# Altium PCB isa_svga.PcbDoc (part 2 of 2)
Units mm, origin at the board's own origin, x right, y up, seen from the top; angles counter-clockwise.
Board outline 104.14 x 87.63 mm, 2 copper layers (Front, Back); 62 components, 153 nets, 436 pads, 95 vias.
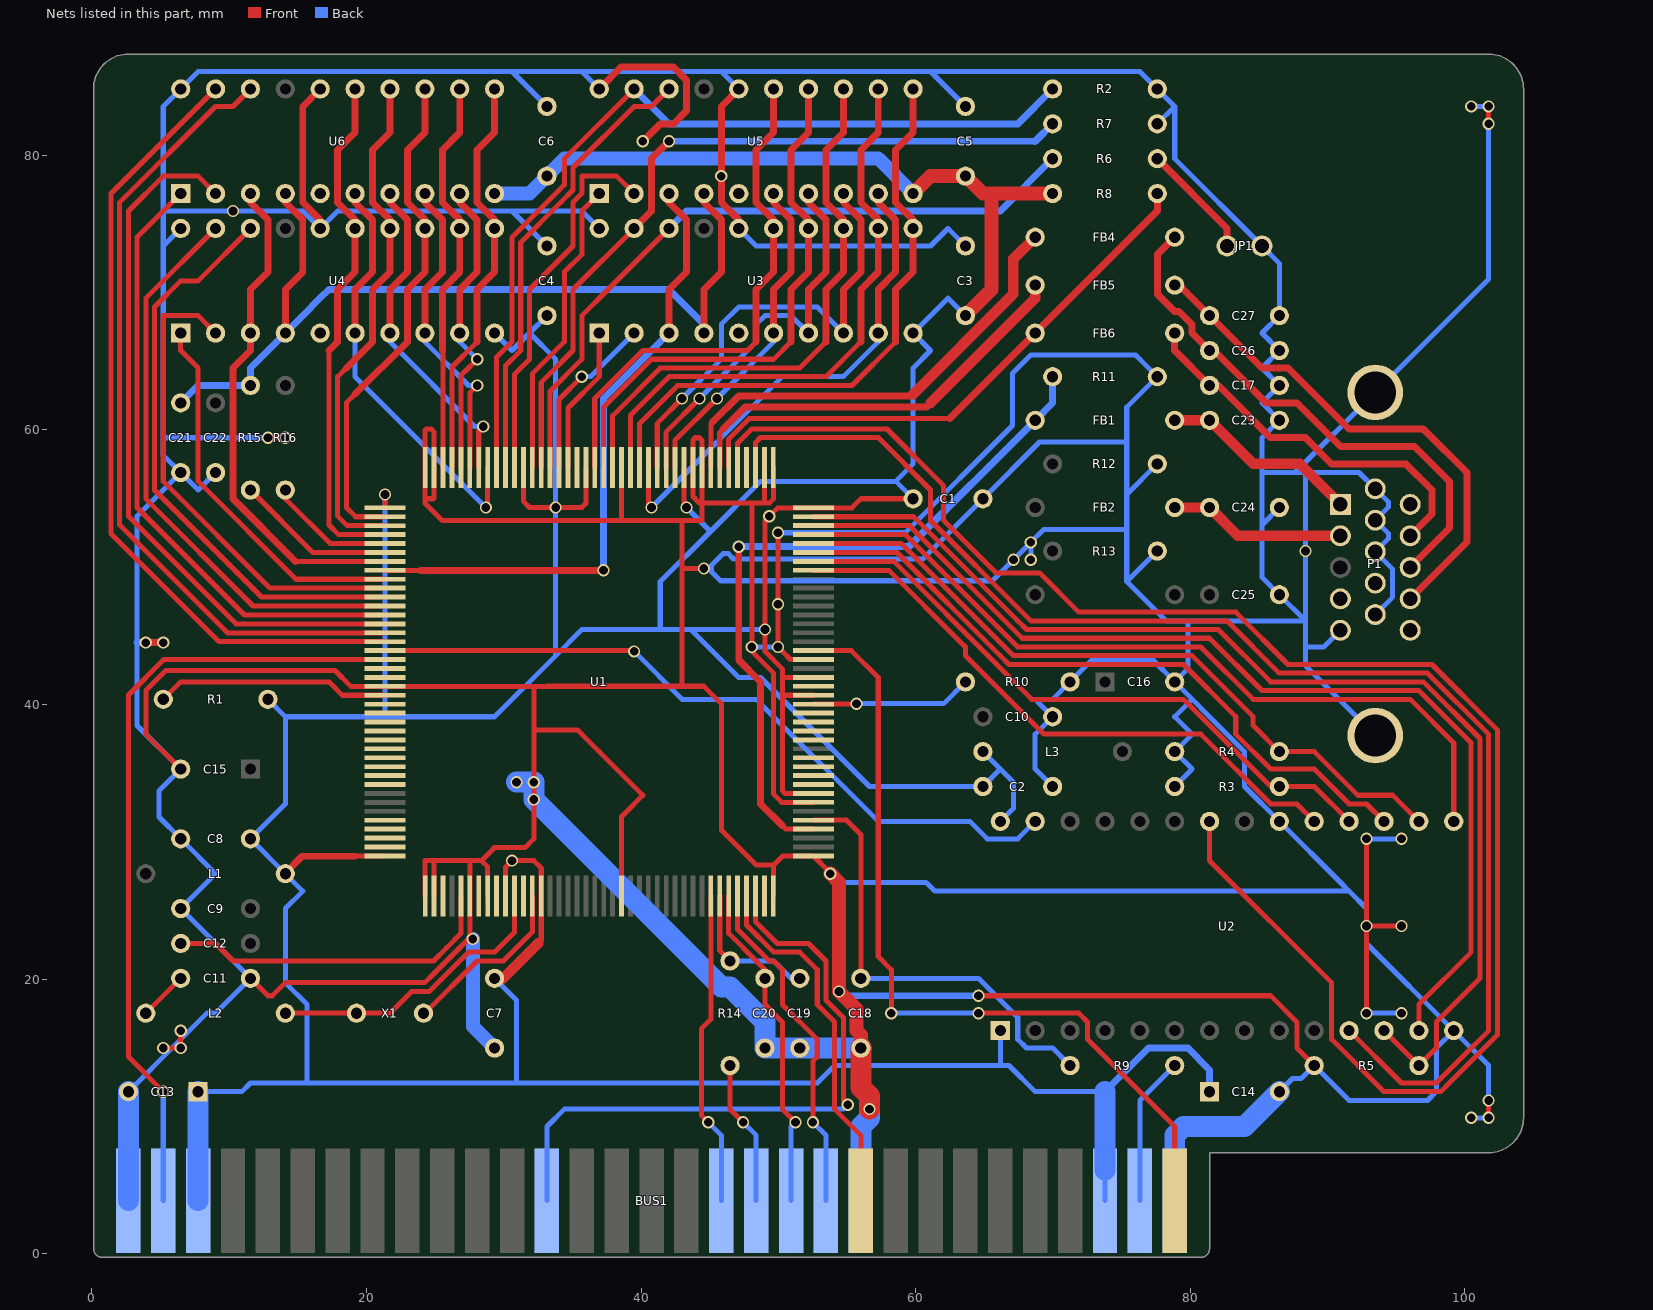
[diagram p2: the nets of this part, all layers, seen from the top]

## Via types
v1: diameter 0.889, hole 0.635, Front to Back, tented both sides, 95 vias

## Nets (pads, with @x,y where several pads share a name; then routed paths per layer and width w, separated by ;. In a path a pad name is that pad's centre, name@x,y a point inside that pad or via, vN(x,y) a via of type N, cw(c..) or ccw(c..) an arc to the next point about the centre after c; other vN are vias at no path point) (continued)
GND: BUS1.1 BUS1.10 BUS1.31 C1.2 C2.2 C3.2 C4.2 C5.2 C6.2 C7.2 C8.2 C9.2 C10.2 C11.2 C13.2 C14.2 C15.2 C16.2 C17.2 C18.2 C19.2 C20.2 C21.2 C22.2 C23.2 C24.2 C25.2 C26.2 C27.2 JP1.2 P1.5 P1.6 P1.7 P1.8 P1.10 P1.Un1 P1.Un2 R2.2 R3.2 R4.2 R5.2 R7.2 R10.2 R11.2 R12.2 R13.2 U1.1 U1.7 U1.23 U1.41 U1.42 U1.49 U1.50 U1.58 U1.79 U1.80 U1.101 U1.121 U1.122 U1.126 U1.128 U1.143 U1.160 U2.14 U2.20 U3.16 U3.20 U4.16 U4.20 U5.16 U5.20 U6.16 U6.20 | length 1092.6
  Front w0.368: v1(5.207,14.986) v1(6.477,14.986) v1(6.477,16.256) ; C15.2@6.477,35.306 3.937,37.846 3.937,41.021 5.397,42.481 17.716,42.481 18.867,41.331 U1.101@21.356,41.331 23.939,41.331 32.194,41.331 ; C11.2@11.557,20.066 12.827,18.796 13.144,18.796 14.097,19.748 24.257,19.748 24.892,20.383 27.432,22.924 v1(27.749,22.924) 27.531,23.142 U1.126@27.531,26.055 27.531,28.639 27.432,28.639 ; v1(12.827,59.436) v1(14.097,59.436) ; U1.121@24.282,26.055 24.282,28.639 24.257,28.639 24.575,28.639 24.892,28.639 ; 24.282,55.283 24.282,55.308 ; U1.122@24.933,26.055 24.933,28.639 24.892,28.639 ; U1.128@28.832,26.055 28.832,28.191 28.384,28.639 ; U1.143@38.583,26.055 38.583,30.861 38.583,31.496 38.583,31.852 38.862,32.131 40.132,33.401 36.957,36.576 35.687,37.846 35.369,38.163 32.194,38.163 ; U1.58@38.583,57.257 38.583,53.404 38.544,53.404 ; v1(44.577,49.911) 42.989,49.911 ; U1.42@48.981,57.257 48.981,54.673 49.022,54.673 ; U1.160@49.632,26.055 49.632,28.321 ; U1.41@49.632,57.257 49.632,54.966 49.34,54.673 49.022,54.673 ; v1(49.974,52.514) v1(49.974,47.307) v1(49.974,44.196) 50.292,43.878 50.889,43.282 U1.23@52.558,43.282 ; U1.7@52.558,32.883 50.249,32.883 49.657,33.475 49.657,42.291 48.387,43.561 48.069,43.878 v1(48.069,44.196) 48.069,53.404 48.069,54.673 ; v1(53.785,27.686) 53.785,27.755 U1.1@52.558,28.981 50.317,28.981 49.657,28.321 49.632,28.321 ; v1(64.579,18.796) 85.852,18.796 87.757,16.891 87.757,14.986 R5.2@89.027,13.716 ; v1(92.837,17.526) 92.837,22.606 v1(92.837,30.226) ; v1(92.837,23.876) v1(95.377,23.876) ; v1(101.727,9.906) v1(101.727,11.176) ; v1(101.727,82.296) v1(101.727,83.566) ; 24.282,54.991 24.282,54.648 25.527,53.404 37.592,53.404 38.544,53.404 ; 24.282,54.991 24.282,55.308 ; 24.282,54.991 24.892,54.991 24.933,55.032 24.933,55.349 U1.79@24.933,57.257 24.933,59.84 24.701,60.071 24.371,60.071 24.282,59.982 U1.80@24.282,57.257 24.282,55.308 ; 24.892,28.639 27.432,28.639 ; 27.432,28.639 28.384,28.639 ; 28.384,28.639 29.019,29.273 29.337,29.591 31.559,29.591 32.194,30.226 32.194,33.401 32.194,34.671 32.194,38.163 ; 32.194,38.163 32.194,39.751 32.194,41.331 ; 32.194,41.331 33.139,41.331 33.147,41.338 42.989,41.338 ; 38.544,53.404 42.989,53.404 ; 42.989,41.338 44.577,41.338 45.847,40.069 45.847,30.861 48.387,28.321 49.632,28.321 ; 42.989,41.338 42.989,49.911 ; 42.989,49.911 42.989,51.181 42.989,53.404 ; 42.989,53.404 44.259,53.404 44.432,53.404 44.432,54.991 ; 44.432,54.991 U1.49@44.432,57.257 44.432,59.263 44.259,59.436 43.942,59.436 43.782,59.276 U1.50@43.782,57.257 43.782,55.151 44.259,54.673 44.577,54.673 ; 44.432,54.991 44.432,54.673 44.577,54.673 ; 44.577,54.673 45.212,54.673 48.069,54.673 ; 48.069,54.673 48.387,54.673 49.022,54.673
  Front w0.505: v1(3.937,44.514) v1(5.207,44.514) ; U4.16@16.637,74.676 16.637,75.311 15.367,76.581 15.367,83.566 U6.16@16.637,84.836 ; U5.20@36.957,84.836 38.544,86.423 42.355,86.423 43.307,85.471 43.307,83.248 42.355,82.296 41.402,82.296 v1(40.132,81.026) ; U3.16@47.117,74.676 47.117,75.311 45.847,76.581 v1(45.847,78.486) 45.847,83.566 U5.16@47.117,84.836
  Front w0.762: 55.689,16.256 56.007,15.938
  Front w1.016: v1(53.785,27.686) 54.419,27.051 v1(54.419,19.113) 55.689,17.843 55.689,16.256 ; C18.2@56.007,14.986 56.007,15.938
  Front w1.524: C18.2@56.007,14.986 56.007,12.128 56.642,11.493 56.642,11.176 v1(56.642,10.541)
  Back w0.368: C13.2@2.667,11.811 6.159,15.303 ; v1(6.477,14.986) 6.159,15.303 ; U4.20@6.477,74.676 5.207,73.406 5.207,73.088 ; C22.2@9.017,56.896 7.747,55.626 C21.2@6.477,56.896 ; v1(12.827,59.436) 5.207,59.436 ; C4.2@33.147,73.406 30.607,75.946 ; C6.2@33.147,83.566 30.607,86.106 ; U3.20@36.957,74.676 35.687,75.946 30.607,75.946 ; U5.20@36.957,84.836 35.687,86.106 ; v1(44.577,49.911) 45.148,49.911 v1@44.895,49.911 ; U3.16@47.117,74.676 48.387,73.406 60.452,73.406 60.77,73.406 61.087,73.406 62.357,74.676 62.517,74.516 C3.2@63.627,73.406 ; U5.16@47.117,84.836 45.847,86.106 ; v1(48.069,44.196) v1(49.974,44.196) ; v1(49.974,52.514) 59.245,52.514 67.056,60.325 67.056,64.135 68.389,65.468 76.01,65.468 76.327,65.151 R11.2@77.597,63.881 75.374,61.658 75.374,59.118 ; v1(53.785,27.686) 54.419,27.051 54.742,27.051 ; 54.737,27.056 54.742,27.051 ; C5.2@63.627,83.566 61.087,86.106 ; v1(68.389,50.546) v1(68.389,51.816) ; C2.2@69.977,34.036 68.707,35.306 68.707,37.846 C10.2@69.977,39.116 69.025,40.069 68.707,40.386 69.977,40.386 R10.2@71.247,41.656 72.834,43.243 77.279,43.243 C16.2@78.867,41.656 ; R13.2@77.597,51.181 75.374,48.959 ; R12.2@77.597,57.531 75.374,55.308 ; R7.2@77.597,82.296 78.867,83.566 ; R3.2@78.867,34.036 80.137,35.306 R4.2@78.867,36.576 80.137,37.846 78.867,39.116 80.137,40.386 ; C14.2@86.487,11.811 87.439,12.763 88.075,12.763 R5.2@89.027,13.716 91.567,11.176 97.282,11.176 97.917,11.811 97.917,14.986 U2.14@99.187,16.256 ; C24.2@86.487,54.356 85.217,53.086 ; P1.5@90.932,45.41 89.718,44.196 88.392,44.196 ; v1(92.837,17.526) v1(95.377,17.526) ; P1.Un1@93.472,37.747 88.392,42.827 88.392,44.196 ; P1.10@93.472,46.556 94.742,47.826 94.742,49.865 P1.8@93.472,51.135 94.424,52.088 94.424,52.474 P1.7@93.472,53.426 94.424,54.379 94.424,54.765 P1.6@93.472,55.717 92.293,56.896 88.392,56.896 ; P1.Un2@94.292,61.465 P1.Un2@94.292,62.161 ; v1(95.377,30.226) v1(92.837,30.226) 92.837,25.146 ; v1(100.457,9.906) v1(101.727,9.906) ; v1(100.457,83.566) v1(101.727,83.566) ; v1(101.727,11.176) 101.727,13.716 U2.14@99.187,16.256 ; v1(101.727,82.296) 101.727,70.99 P1.Un2@93.472,62.735 87.633,56.896 ; 5.207,59.436 5.207,73.088 ; 5.207,59.436 5.207,58.166 C21.2@6.477,56.896 ; 5.207,73.088 5.207,75.946 ; 5.207,75.946 v1(10.287,75.946) 15.367,75.946 U4.16@16.637,74.676 17.907,75.946 30.607,75.946 ; 5.207,75.946 5.207,83.566 U6.20@6.477,84.836 7.747,86.106 30.607,86.106 ; 6.159,15.303 8.382,17.526 9.017,17.526 C11.2@11.557,20.066 C9.2@6.477,25.146 8.7,27.368 9.017,27.686 C8.2@6.477,30.226 4.889,31.813 4.889,33.718 C15.2@6.477,35.306 3.302,38.481 3.302,44.514 3.302,45.466 3.302,53.721 C21.2@6.477,56.896 ; 30.607,86.106 35.687,86.106 ; 35.687,86.106 45.847,86.106 ; 45.847,86.106 60.77,86.106 61.087,86.106 ; 54.742,27.051 59.182,27.051 60.77,27.051 61.404,26.416 91.567,26.416 ; 61.087,86.106 76.327,86.106 R2.2@77.597,84.836 78.867,83.566 ; v1(68.389,51.816) 69.342,52.768 75.374,52.768 ; v1(68.389,51.816) 68.072,51.498 67.437,50.863 v1(67.12,50.546) 65.596,49.022 45.783,49.022 45.148,49.657 45.148,50.165 45.974,50.99 46.355,50.99 46.736,50.609 60.515,50.609 C1.2@64.897,54.991 69.025,59.118 75.374,59.118 ; 75.374,48.959 75.374,52.768 ; 75.374,48.959 78.232,46.101 79.819,46.101 ; 75.374,52.768 75.374,55.308 ; 75.374,55.308 75.374,58.801 75.374,59.118 ; C16.2@78.867,41.656 79.819,42.608 79.819,46.101 ; C16.2@78.867,41.656 80.137,40.386 ; 78.867,83.566 78.867,79.756 JP1.2@85.217,73.406 86.487,72.136 C27.2@86.487,68.326 85.217,67.056 C26.2@86.487,65.786 85.217,64.516 C17.2@86.487,63.246 85.217,61.976 C23.2@86.487,60.706 85.217,59.436 ; 79.819,46.101 82.677,46.101 88.392,46.101 ; 80.137,40.386 81.407,39.116 83.947,36.576 83.947,34.036 U2.20@86.487,31.496 90.932,27.051 91.567,26.416 ; 85.217,53.086 85.217,59.436 ; 85.217,53.086 85.217,49.276 C25.2@86.487,48.006 88.392,46.101 ; 85.217,59.436 85.217,56.896 87.633,56.896 ; 87.633,56.896 88.392,56.896 ; 88.392,44.196 88.392,46.101 ; 88.392,46.101 v1(88.392,51.181) 88.392,56.896 ; 91.567,26.416 92.837,25.146 ; 92.837,25.146 v1(92.837,23.876) 92.837,22.606 U2.14@99.187,16.256
  Back w0.505: 3.302,44.514 v1(3.937,44.514) ; v1(54.419,19.113) 54.737,18.796 v1(64.579,18.796)
  Back w1.016: v1(27.749,22.924) 27.749,16.573 C7.2@29.337,14.986
  Back w1.524: BUS1.31@2.667,3.873 C13.2@2.667,11.811 ; v1(30.924,34.353) v1(32.194,34.353) v1(32.194,33.084) 45.847,19.431 46.482,19.431 49.022,16.891 C20.2@49.022,14.986 C19.2@51.562,14.986 C18.2@56.007,14.986 ; BUS1.10@56.007,3.873 56.007,9.271 56.642,9.906 v1(56.642,10.541) ; BUS1.1@78.867,3.873 78.867,8.636 79.502,9.271 83.947,9.271 C14.2@86.487,11.811
GREEN: C24.1 FB2.2 P1.2 | length 12.9
  Front w0.762: FB2.2@78.867,54.356 C24.1@81.407,54.356 83.472,52.291 P1.2@90.932,52.291
HSYNC: FB4.2 U1.48 | length 33.9
  Front w0.368: U1.48@45.082,57.257 45.082,60.449 45.209,60.576
  Front w0.508: 45.209,60.576 47.117,62.484 59.182,62.484 59.69,62.484 59.817,62.611
  Front w0.762: 59.817,62.611 66.962,69.756 67.12,69.913 67.12,72.453 FB4.2@68.707,74.041
I\O\R\: BUS1.14 U1.153 | length 23.1
  Front w0.368: 44.42,16.416 44.42,16.421 ; v1(44.895,9.588) 44.42,10.063 44.42,16.256 44.42,16.421 ; U1.153@45.082,26.055 45.082,17.084 44.42,16.421
  Back w0.368: v1(44.895,9.588) 45.847,8.636 BUS1.14@45.847,3.873
I\O\W\: BUS1.13 R14.1 | length 10.6
  Front w0.368: R14.1@46.482,13.716 46.482,10.541 v1(47.434,9.588)
  Back w0.368: v1(47.434,9.588) 48.387,8.636 BUS1.13@48.387,3.873
IOCHRDY: BUS1.41 U1.157 | length 26.7
  Front w0.368: U1.157@47.681,26.055 47.681,23.947 49.657,21.971 51.562,21.971 52.832,20.701 52.832,18.161 54.102,16.891 54.102,16.886 54.102,10.541 56.007,8.636 BUS1.41@56.007,3.873
M\E\M\R\: BUS1.12 C20.1 U1.155 | length 24.3
  Front w0.368: U1.155@46.383,26.055 46.383,23.34 48.387,21.336 49.022,20.701 C20.1@49.022,20.066 49.022,18.161 50.292,16.891 50.292,10.541 v1(51.244,9.588)
  Back w0.368: BUS1.12@50.927,3.873 50.927,9.271 v1(51.244,9.588)
M\E\M\W\: BUS1.11 U1.156 | length 25.3
  Front w0.368: U1.156@47.031,26.055 47.031,23.645 49.34,21.336 49.657,21.336 50.292,20.701 50.292,18.161 52.832,15.621 52.832,14.668 52.832,14.351 52.514,14.034 v1(52.514,9.588)
  Back w0.368: v1(52.514,9.588) 53.467,8.636 BUS1.11@53.467,3.873
MAA0: U1.52 U3.6 U5.6 | length 24
  Front w0.368: U1.52@42.481,57.257 42.481,59.245 v1(45.529,62.293)
  Front w0.505: U3.6@49.657,67.056 49.657,70.231 50.927,71.501 50.927,75.311 49.657,76.581 U5.6@49.657,77.216
  Back w0.368: v1(45.529,62.293) 49.657,66.421 U3.6@49.657,67.056
MAA1: U1.53 U3.7 U5.7 | length 29
  Front w0.368: U1.53@41.831,57.257 41.831,59.865 v1(44.259,62.293)
  Front w0.505: U3.7@52.197,67.056 52.197,70.231 53.467,71.501 53.467,75.311 52.197,76.581 U5.7@52.197,77.216
  Back w0.368: v1(44.259,62.293) 48.387,66.421 48.387,67.691 49.022,68.326 50.927,68.326 U3.7@52.197,67.056
MAA2: U1.54 U3.8 U5.8 | length 33.8
  Front w0.368: U1.54@41.181,57.257 41.181,60.485 v1(42.989,62.293)
  Front w0.505: U3.8@54.737,67.056 54.737,70.231 56.007,71.501 56.007,75.311 54.737,76.581 U5.8@54.737,77.216
  Back w0.368: v1(42.989,62.293) 45.847,65.151 45.847,67.691 47.117,68.961 52.832,68.961 U3.8@54.737,67.056
MAA3: U1.55 U3.9 U5.9 | length 36.4
  Front w0.368: U1.55@40.533,57.257 40.533,54.59 v1(40.767,54.356)
  Front w0.505: U3.9@57.277,67.056 57.277,70.231 58.547,71.501 58.547,75.311 57.277,76.581 U5.9@57.277,77.216
  Back w0.368: v1(40.767,54.356) 50.292,63.881 54.737,63.881 57.277,66.421 U3.9@57.277,67.056
MAA4: U1.56 U3.11 U5.11 | length 44.3
  Front w0.368: U1.56@39.883,57.257 39.883,60.457 42.672,63.246 52.832,63.246 55.372,63.246 58.547,66.421
  Front w0.505: 58.547,66.421 58.547,70.231 59.817,71.501 U3.11@59.817,74.676 59.817,75.311 58.547,76.581 58.547,80.391 59.817,81.661 U5.11@59.817,84.836
MAA5: U1.57 U3.12 U5.12 | length 42.8
  Front w0.368: U1.57@39.233,57.257 39.233,61.077 42.037,63.881 50.927,63.881 53.467,63.881 56.007,66.421
  Front w0.505: 56.007,66.421 56.007,70.231 57.277,71.501 U3.12@57.277,74.676 57.277,75.311 56.007,76.581 56.007,80.391 57.277,81.661 U5.12@57.277,84.836
MAA6: U1.59 U3.13 U5.13 | length 41.5
  Front w0.368: U1.59@37.932,57.257 37.932,61.046 41.402,64.516 49.022,64.516 51.562,64.516 53.467,66.421
  Front w0.505: 53.467,66.421 53.467,70.231 54.737,71.501 U3.13@54.737,74.676 54.737,75.311 53.467,76.581 53.467,80.391 54.737,81.661 U5.13@54.737,84.836
MAA7: U1.60 U3.14 U5.14 | length 40
  Front w0.368: U1.60@37.282,57.257 37.282,61.666 40.767,65.151 47.117,65.151 49.657,65.151 50.927,66.421
  Front w0.505: 50.927,66.421 50.927,70.231 52.197,71.501 U3.14@52.197,74.676 52.197,75.311 50.927,76.581 50.927,80.391 52.197,81.661 U5.14@52.197,84.836
MAA8: U1.61 U3.15 U5.15 | length 38.5
  Front w0.368: U1.61@36.632,57.257 36.632,62.286 40.132,65.786 47.752,65.786 48.387,66.421
  Front w0.505: 48.387,66.421 48.387,70.231 49.657,71.501 U3.15@49.657,74.676 49.657,75.311 48.387,76.581 48.387,80.391 49.657,81.661 U5.15@49.657,84.836
MAB0: U1.73 U4.6 U6.6 | length 30.8
  Front w0.368: v1(28.702,54.356) 28.832,54.486 U1.73@28.832,57.257
  Front w0.505: U4.6@19.177,67.056 19.177,70.231 20.447,71.501 20.447,75.311 19.177,76.581 U6.6@19.177,77.216
  Back w0.368: U4.6@19.177,67.056 19.177,63.881 v1(28.702,54.356)
MAB1: U1.74 U4.7 U6.7 | length 24.3
  Front w0.368: U1.74@28.181,57.257 28.181,59.931 v1(28.511,60.261)
  Front w0.505: U4.7@21.717,67.056 21.717,70.231 22.987,71.501 22.987,75.311 21.717,76.581 U6.7@21.717,77.216
  Back w0.368: U4.7@21.717,67.056 21.717,66.421 27.877,60.261 v1(28.511,60.261)
MAB2: U1.75 U4.8 U6.8 | length 23.2
  Front w0.368: U1.75@27.531,57.257 27.531,62.71 v1(28.067,63.246)
  Front w0.505: U4.8@24.257,67.056 24.257,70.231 25.527,71.501 25.527,75.311 24.257,76.581 U6.8@24.257,77.216
  Back w0.368: U4.8@24.257,67.056 24.257,66.421 27.432,63.246 v1(28.067,63.246)
MAB3: U1.76 U4.9 U6.9 | length 22
  Front w0.368: U1.76@26.881,57.257 26.881,63.965 27.432,64.516 27.749,64.834 v1(28.067,65.151)
  Front w0.505: U4.9@26.797,67.056 26.797,70.231 28.067,71.501 28.067,75.311 26.797,76.581 U6.9@26.797,77.216
  Back w0.368: U4.9@26.797,67.056 26.797,66.421 v1(28.067,65.151)
MAB4: U1.77 U4.11 U6.11 | length 29.9
  Front w0.368: U1.77@26.233,57.257 26.233,64.587 28.067,66.421
  Front w0.505: 28.067,66.421 28.067,70.231 29.337,71.501 29.337,72.771 U4.11@29.337,74.676 29.337,75.311 28.067,76.581 28.067,80.391 29.337,81.661 U6.11@29.337,84.836
MAB5: U1.78 U4.12 U6.12 | length 29.2
  Front w0.368: 25.527,65.786 25.583,65.73 U1.78@25.583,57.257
  Front w0.505: 25.527,65.786 25.527,70.231 26.797,71.501 U4.12@26.797,74.676 26.797,75.311 25.527,76.581 25.527,80.391 26.797,81.661 U6.12@26.797,84.836
MAB6: U1.82 U4.13 U6.13 | length 37
  Front w0.368: 19.177,62.611 18.542,61.976 18.542,60.706 18.542,54.356 19.218,53.68 U1.82@21.356,53.68
  Front w0.505: 19.177,62.611 22.987,66.421 22.987,70.231 24.257,71.501 U4.13@24.257,74.676 24.257,75.311 22.987,76.581 22.987,80.391 24.257,81.661 U6.13@24.257,84.836
MAB7: U1.83 U4.14 U6.14 | length 37.5
  Front w0.368: 18.542,64.516 17.907,63.881 17.907,62.611 17.907,53.721 18.598,53.03 U1.83@21.356,53.03
  Front w0.505: 18.542,64.516 20.447,66.421 20.447,70.231 21.717,71.501 U4.14@21.717,74.676 21.717,75.311 20.447,76.581 20.447,80.391 21.717,81.661 U6.14@21.717,84.836
MAB8: U1.84 U4.15 U6.15 | length 38
  Front w0.368: 17.272,65.786 17.272,53.086 17.978,52.38 U1.84@21.356,52.38
  Front w0.505: 17.272,65.786 17.907,66.421 17.907,70.231 19.177,71.501 U4.15@19.177,74.676 19.177,75.311 17.907,76.581 17.907,80.391 19.177,81.661 U6.15@19.177,84.836
MD0: U1.64 U3.1 | length 10.7
  Front w0.368: U1.64@34.681,57.257 34.681,59.436 34.681,59.7 34.681,61.341 34.681,61.605 36.957,63.881 36.957,65.151 U3.1@36.957,67.056
MD1: U1.65 U3.2 | length 12.4
  Front w0.368: U1.65@34.031,57.257 34.031,60.071 34.031,61.341 34.031,62.225 v1(35.687,63.881)
  Back w0.368: v1(35.687,63.881) 36.322,63.881 37.592,65.151 U3.2@39.497,67.056
MD2: R6.1 U1.66 U3.18 | length 51
  Front w0.368: U1.66@33.381,57.257 33.381,60.071 33.381,60.706 33.381,61.976 33.381,62.845 35.687,65.151 35.687,66.421 35.687,67.056 35.687,68.326 37.592,70.231 U3.18@42.037,74.676
  Back w0.505: U3.18@42.037,74.676 43.307,75.946 66.167,75.946
  Back w0.508: 66.167,75.946 R6.1@69.977,79.756
MD3: R7.1 U1.67 U3.19 | length 56.1
  Front w0.368: U1.67@32.733,57.257 32.733,61.341 32.733,62.611 32.733,63.467 35.052,65.786 35.052,67.056 35.052,70.231 U3.19@39.497,74.676
  Front w0.505: U3.19@39.497,74.676 40.767,75.946 40.767,79.756 v1(42.037,81.026)
  Back w0.505: v1(42.037,81.026) 68.707,81.026
  Back w0.508: 68.707,81.026 R7.1@69.977,82.296
MD4: U1.68 U5.1 | length 22
  Front w0.368: U1.68@32.083,57.257 32.083,63.246 32.083,64.087 34.417,66.421 34.417,67.691 34.417,71.501 35.687,72.771 35.687,74.041 35.687,75.311 35.687,75.946 U5.1@36.957,77.216
MD5: U1.70 U5.2 | length 27.6
  Front w0.368: U1.70@30.782,57.257 30.782,61.341 30.782,61.976 30.782,62.611 30.782,64.056 31.242,64.516 31.877,65.151 31.877,66.421 31.877,70.231 35.052,73.406 35.052,74.676 35.052,76.581 35.687,77.216 35.687,78.486 38.227,78.486 U5.2@39.497,77.216
MD6: U1.71 U5.18 | length 33.3
  Front w0.368: U1.71@30.132,57.257 30.132,62.611 30.132,63.881 30.132,64.676 30.607,65.151 30.612,65.151 31.242,65.781 31.242,72.136 31.242,73.406 31.242,73.66 34.163,76.581 35.052,77.47 35.052,79.121 39.497,83.566 40.767,83.566 U5.18@42.037,84.836
MD7: R2.1 U1.72 U5.19 | length 64.3
  Front w0.368: U1.72@29.482,57.257 29.482,64.516 29.482,65.296 30.607,66.421 30.607,72.771 30.607,74.041 33.782,77.216 34.417,77.851 34.417,79.756 U5.19@39.497,84.836
  Back w0.505: U5.19@39.497,84.836 42.037,82.296 67.437,82.296
  Back w0.508: 67.437,82.296 R2.1@69.977,84.836
MD16: U1.89 U4.1 | length 27.9
  Front w0.368: U4.1@6.477,67.056 6.477,65.786 7.747,64.516 7.747,56.261 14.877,49.131 U1.89@21.356,49.131
MD17: U1.90 U4.2 | length 35.8
  Front w0.368: U4.2@9.017,67.056 7.747,68.326 5.207,68.326 5.207,56.261 12.987,48.481 U1.90@21.356,48.481
MD18: U1.91 U4.18 | length 42.7
  Front w0.368: U4.18@11.557,74.676 7.747,70.866 6.477,70.866 4.572,68.961 4.572,55.626 12.367,47.831 U1.91@21.356,47.831
MD19: U1.92 U4.19 | length 42.4
  Front w0.368: U4.19@9.017,74.676 3.937,69.596 3.937,54.991 11.747,47.18 U1.92@21.356,47.18
MD20: U1.93 U6.1 | length 45.5
  Front w0.368: U6.1@6.477,77.216 3.302,74.041 3.302,54.356 11.128,46.53 U1.93@21.356,46.53
MD21: U1.94 U6.2 | length 52.1
  Front w0.368: U6.2@9.017,77.216 7.747,78.486 5.207,78.486 2.667,75.946 2.667,53.721 10.508,45.88 U1.94@21.356,45.88
MD22: U1.95 U6.18 | length 59
  Front w0.368: U6.18@11.557,84.836 10.287,83.566 9.017,83.566 2.032,76.581 2.032,53.086 9.888,45.23 U1.95@21.356,45.23
MD23: U1.96 U6.19 | length 58.8
  Front w0.368: U6.19@9.017,84.836 1.397,77.216 1.397,52.451 9.266,44.582 U1.96@21.356,44.582
MONITOR: FB6.2 R8.1 U1.46 | length 41.4
  Front w0.368: U1.46@46.383,57.257 46.383,59.337 47.117,60.071 47.434,60.389 47.879,60.833 62.484,60.833
  Front w0.508: 62.484,60.833 FB6.2@68.707,67.056 77.597,75.946 R8.1@77.597,77.216
N\M\I\: BUS1.32 U1.24 | length 60.6
  Front w0.368: U1.24@52.558,43.932 54.102,43.932 55.319,43.932 57.277,41.974 57.277,21.653 58.229,20.701 v1(58.229,17.526) ; v1(64.579,17.526) 71.882,17.526 72.517,16.891 72.517,15.621 78.867,9.271 BUS1.32@78.867,3.873
  Back w0.368: v1(58.229,17.526) v1(64.579,17.526)
Net-(C11-Pad1): C11.1 L2.1 | length 3.6
  Front w0.368: L2.1@3.937,17.526 C11.1@6.477,20.066
Net-(C12-Pad2): C12.2 U1.125 | length 24.5
  Front w0.368: C12.2@6.477,22.606 9.017,22.606 10.287,21.336 24.892,21.336 25.85,22.294 26.881,23.325 U1.125@26.881,26.055
Net-(C17-Pad1): C17.1 FB6.1 P1.12 | length 28.2
  Front w0.508: FB6.1@78.867,67.056 78.867,65.786 C17.1@81.407,63.246 82.042,63.246 85.852,59.436 88.392,59.436 90.297,57.531 95.694,57.531 97.599,55.626 97.599,54.038 97.599,53.878 P1.12@96.012,52.291
Net-(C18-Pad1): C18.1 R9.2 U1.5 | length 33.2
  Front w0.368: U1.5@52.558,31.582 54.737,31.582 54.968,31.582 56.007,30.543 C18.1@56.007,20.066
  Back w0.368: C18.1@56.007,20.066 64.579,20.066 67.437,17.209 67.437,15.621 68.072,14.986 69.342,14.986 69.977,14.986 R9.2@71.247,13.716
Net-(C19-Pad1): C19.1 R14.2 U1.154 | length 10.6
  Front w0.368: U1.154@45.733,26.055 45.733,22.085 R14.2@46.482,21.336
  Back w0.368: R14.2@46.482,21.336 49.657,21.336 50.927,20.066 C19.1@51.562,20.066
Net-(C26-Pad1): C26.1 FB4.1 P1.13 | length 39.4
  Front w0.508: FB4.1@78.867,74.041 77.597,72.771 77.597,69.913 78.867,68.644 79.184,68.644 80.137,67.691 80.137,67.056 80.772,66.421 C26.1@81.407,65.786 81.724,65.786 85.534,61.976 87.757,61.976 90.932,58.801 96.329,58.801 98.87,56.261 98.87,52.85 P1.13@96.012,49.992
Net-(C27-Pad1): C27.1 FB5.1 P1.14 | length 37.8
  Front w0.508: FB5.1@78.867,70.549 79.184,70.549 C27.1@81.407,68.326 85.217,64.516 87.122,64.516 91.567,60.071 96.965,60.071 100.139,56.896 100.139,51.829 P1.14@96.012,47.701
Net-(JP1-Pad1): JP1.1 R6.2 | length 8.5
  Front w0.508: R6.2@77.597,79.756 82.677,74.676 JP1.1@82.677,73.406
Net-(L2-Pad2): L2.2 U1.131 X1.2 | length 21.8
  Front w0.368: L2.2@14.097,17.526 X1.2@19.276,17.526 21.717,17.526 23.304,19.113 24.575,19.113 27.432,21.971 29.337,21.971 29.972,22.606 30.29,22.924 30.782,23.416 U1.131@30.782,26.055
Net-(P1-Pad4): P1.4
Net-(P1-Pad9): P1.9
Net-(P1-Pad11): P1.11
Net-(P1-Pad15): P1.15
Net-(R1-Pad1): R1.1 U1.102 | length 17.1
  Front w0.368: R1.1@5.207,40.386 6.477,41.656 17.272,41.656 18.247,40.681 U1.102@21.356,40.681
Net-(R10-Pad1): R10.1 U1.18 | length 11.8
  Front w0.368: U1.18@52.558,40.033 v1@55.654,40.033 ; v1@55.654,40.033 v1(55.689,40.069) v1@55.654,40.033
  Back w0.368: v1(55.689,40.069) 62.039,40.069 R10.1@63.627,41.656
Net-(R15-Pad1): R15.1 U1.86 | length 11.7
  Front w0.368: R15.1@11.557,55.626 16.101,51.082 16.637,51.082 U1.86@21.356,51.082
Net-(R16-Pad1): R16.1 U1.85 | length 9.2
  Front w0.368: R16.1@14.097,55.626 14.097,54.991 17.358,51.73 U1.85@21.356,51.73
Net-(U1-Pad9): U1.9
Net-(U1-Pad10): U1.10
Net-(U1-Pad11): U1.11
Net-(U1-Pad12): U1.12
Net-(U1-Pad14): U1.14
Net-(U1-Pad15): U1.15
Net-(U1-Pad16): U1.16
Net-(U1-Pad17): U1.17
Net-(U1-Pad20): U1.20
Net-(U1-Pad44): U1.44
Net-(U1-Pad63): U1.63
Net-(U1-Pad99): U1.99
Net-(U1-Pad100): U1.100
Net-(U1-Pad103): U1.103
Net-(U1-Pad104): U1.104
Net-(U1-Pad105): U1.105
Net-(U1-Pad106): U1.106
Net-(U1-Pad107): U1.107
Net-(U1-Pad108): U1.108
Net-(U1-Pad109): U1.109
Net-(U1-Pad110): U1.110
Net-(U1-Pad111): U1.111
Net-(U1-Pad112): U1.112
Net-(U1-Pad116): U1.116
Net-(U1-Pad117): U1.117
Net-(U1-Pad118): U1.118
Net-(U1-Pad119): U1.119
Net-(U1-Pad123): U1.123
Net-(U1-Pad127): U1.127
Net-(U1-Pad129): U1.129
Net-(U1-Pad132): U1.132
Net-(U1-Pad133): U1.133 X1.1 | length 13
  Front w0.368: X1.1@24.158,17.526 24.252,17.526 28.062,21.336 ; U1.133@32.083,26.055 32.083,23.447 30.607,21.971 30.29,21.653 29.972,21.336 28.062,21.336 ; 28.062,21.336 28.062,21.341 28.062,21.336
Net-(U1-Pad159): U1.159
Net-(U3-Pad5): U3.5
Net-(U4-Pad5): U4.5
Net-(U5-Pad5): U5.5
Net-(U6-Pad5): U6.5
OSC: BUS1.30 U1.98 | length 57.6
  Front w0.368: v1(5.207,11.811) 2.667,14.351 2.667,40.703 5.245,43.282 U1.98@21.356,43.282
  Back w0.368: BUS1.30@5.207,3.873 v1(5.207,11.811)
R: FB1.1 R11.1 U1.4 | length 53.1
  Front w0.368: 50.292,31.178 50.538,30.932 U1.4@52.558,30.932
  Front w0.505: v1(47.117,51.498) 47.117,43.243 48.704,41.656
  Front w0.508: 48.704,41.656 48.704,32.766 50.292,31.178
  Back w0.508: v1(47.117,51.498) 58.864,51.498 59.499,51.498 FB1.1@68.707,60.706 69.977,61.976 R11.1@69.977,63.881
R\A\S\: C21.1 R15.2 U3.4 U4.4 U5.4 U6.4 | length 66.4
  Front w0.368: U5.4@44.577,76.581 U5.4@44.577,77.216
  Front w0.505: U4.4@14.097,67.056 14.097,70.231 15.367,71.501 15.367,75.311 14.097,76.581 U6.4@14.097,77.216 ; U3.4@44.577,67.056 44.577,70.231 45.847,71.501 45.847,75.311 U5.4@44.577,76.581
  Back w0.505: C21.1@6.477,61.976 7.747,63.246 R15.2@11.557,63.246 11.557,64.516 U4.4@14.097,67.056 15.367,68.326 16.637,69.596 17.272,70.231 40.767,70.231 42.037,70.231 44.577,67.691 U3.4@44.577,67.056
R\E\F\R\E\S\H\: BUS1.19 U1.158 | length 47.3
  Front w0.368: U1.158@48.331,26.055 48.331,24.186 49.911,22.606 51.88,22.606 52.197,22.606 53.467,21.336 53.467,18.473 54.732,17.209 54.737,17.209 54.737,11.181 54.732,11.176 54.737,11.176 v1(55.054,10.858)
  Back w0.368: BUS1.19@33.147,3.873 33.147,9.271 34.417,10.541 54.737,10.541 v1(55.054,10.858)
R\O\M\C\S\: U1.45 U2.22 | length 125.3
  Front w0.368: U1.45@47.033,57.257 47.033,59.04 48.067,60.074 ; 48.069,60.076 48.067,60.074 ; U2.22@81.407,31.496 81.407,28.639 90.297,19.748 90.297,15.621 94.107,11.811 98.234,11.811 98.87,12.446 100.139,13.716 102.362,15.938 102.362,38.163 97.599,42.926 87.122,42.926 83.312,46.736 ; 83.307,46.731 83.312,46.736 ; 48.067,60.074 57.909,60.074 57.912,60.076 57.912,60.071 62.039,55.944 62.039,53.404 65.849,49.593 69.025,49.593 71.882,46.736 83.312,46.736
RED: C23.1 FB1.2 P1.1 | length 14.6
  Front w0.762: FB1.2@78.867,60.706 C23.1@81.407,60.706 84.582,57.531 87.983,57.531 P1.1@90.932,54.582
RESET: BUS1.2 R9.1 | length 10.9
  Back w0.368: BUS1.2@76.327,3.873 76.327,11.176 R9.1@78.867,13.716
RMD0: U1.43 U2.11 | length 100.5
  Front w0.368: U1.43@48.331,57.257 48.331,59.073 48.704,59.446 57.267,59.446 61.087,55.626 61.087,53.404 67.754,46.736 68.389,46.101 82.677,46.101 86.487,42.291 97.282,42.291 101.727,37.846 101.727,16.256 99.827,14.356 97.917,12.446 95.377,12.446 U2.11@91.567,16.256
RMD1: R5.1 U1.39 U2.12 | length 84.5
  Front w0.368: U1.39@52.558,53.683 59.855,53.683 67.437,46.101 68.072,45.466 82.042,45.466 85.852,41.656 96.965,41.656 101.092,37.529 101.092,20.066 97.917,16.891 97.917,14.986 R5.1@96.647,13.716 U2.12@94.107,16.256
RMD2: U1.38 U2.13 | length 81.5
  Front w0.368: U1.38@52.558,53.033 59.499,53.033 ; U2.13@96.647,16.256 96.647,18.161 100.457,21.971 100.457,37.211 ; 97.282,40.386 100.457,37.211 ; 59.499,53.033 59.553,53.033 ; 59.499,53.033 59.553,53.033 ; 59.553,53.033 67.754,44.831 81.407,44.831 85.217,41.021 96.647,41.021 100.457,37.211
RMD3: U1.37 U2.15 | length 58.6
  Front w0.368: U1.37@52.558,52.382 59.251,52.382 66.802,44.831 67.437,44.196 80.772,44.196 84.582,40.386 96.012,40.386 99.187,37.211 U2.15@99.187,31.496
RMD4: R4.1 U1.36 U2.16 | length 52.8
  Front w0.368: U1.36@52.558,51.732 58.948,51.732 66.484,44.196 67.12,43.561 80.137,43.561 84.582,39.116 84.582,38.481 R4.1@86.487,36.576 89.027,36.576 92.202,33.401 94.742,33.401 U2.16@96.647,31.496
RMD5: U1.35 U2.17 | length 50.4
  Front w0.368: U1.35@52.558,51.082 58.646,51.082 66.167,43.561 66.802,42.926 79.502,42.926 83.312,39.116 83.312,37.846 85.852,35.306 89.027,35.306 91.567,32.766 92.837,32.766 U2.17@94.107,31.496
RMD6: R3.1 U1.34 U2.18 | length 46.9
  Front w0.368: U1.34@52.558,50.432 58.407,50.432 65.913,42.926 68.453,40.386 79.502,40.386 85.852,34.036 R3.1@86.487,34.036 89.027,34.036 U2.18@91.567,31.496
RMD7: U1.33 U2.19 | length 44.4
  Front w0.368: U1.33@52.558,49.781 57.277,49.781 57.912,49.781 58.042,49.781 63.309,44.514 63.627,44.196 63.627,43.561 69.183,38.005 69.342,37.846 80.772,37.846 85.852,32.766 87.757,32.766 U2.19@89.027,31.496
ROMA0: U1.97 U2.27 | length 53.6
  Front w0.368: U1.97@21.356,43.932 38.174,43.932 38.227,43.932 39.444,43.932 v1(39.497,43.878)
  Back w0.368: v1(39.497,43.878) 42.989,40.386 48.387,40.386 49.34,39.433 57.277,31.496 63.944,31.496 65.215,30.226 67.437,30.226 U2.27@68.707,31.496
VCC: BUS1.3 BUS1.29 C1.1 C2.1 C3.1 C4.1 C5.1 C6.1 C7.1 C8.1 C13.1 C14.1 L1.1 L3.1 R1.2 R8.2 U1.8 U1.19 U1.21 U1.40 U1.51 U1.62 U1.69 U1.81 U1.120 U1.130 U1.134 U2.1 U2.28 U3.10 U4.10 U5.10 U6.10 | length 431.3
  Front w0.368: 19.177,28.956 19.202,28.981 U1.120@21.356,28.981 ; U1.81@21.356,54.331 v1(21.356,55.308) ; C7.1@29.337,20.066 C7.1@29.972,20.066 ; U1.130@30.132,26.055 30.132,28.164 v1(30.607,28.639) 31.242,28.639 32.194,28.639 32.733,28.1 U1.134@32.733,26.055 32.733,22.827 32.512,22.606 ; U1.69@31.432,57.257 31.432,54.8 31.877,54.356 v1(33.782,54.356) 35.687,54.356 35.982,54.651 U1.62@35.982,57.257 ; U1.51@43.132,57.257 43.132,54.531 v1(43.307,54.356) ; U1.8@52.558,33.531 50.49,33.531 50.292,33.729 50.292,40.703 ; U1.19@52.558,40.681 50.292,40.681 50.292,40.703 ; U1.21@52.558,41.981 50.292,41.981 50.292,41.974 ; C1.1@59.817,54.991 56.007,54.991 55.347,54.331 55.054,54.331 U1.40@52.558,54.331 49.949,54.331 v1(49.34,53.721) 49.022,53.404 v1(49.022,45.466) 49.022,43.878 50.292,42.608 50.292,41.974 ; 50.292,40.703 50.292,41.974
  Front w0.508: L1.1@14.097,27.686 14.097,27.737 15.316,28.956 19.177,28.956
  Front w0.762: C7.1@29.337,20.066 29.972,20.066 32.512,22.606
  Front w1.016: U5.10@59.817,77.216 61.087,78.486 C5.1@63.627,78.486 64.897,77.216 65.532,77.216 ; C3.1@63.627,68.326 65.532,70.231 65.532,77.216 ; R8.2@69.977,77.216 65.532,77.216
  Back w0.368: C13.1@7.747,11.811 10.922,11.811 11.557,12.446 15.684,12.446 ; R1.2@12.827,40.386 14.097,39.116 ; 15.684,16.573 15.684,17.209 ; v1(21.356,55.308) 21.356,39.159 21.399,39.116 ; C7.1@29.337,20.066 30.924,18.479 30.924,12.446 ; U4.10@29.337,67.056 30.607,65.786 31.877,67.056 ; C4.1@33.147,68.326 31.877,67.056 ; v1(43.307,54.356) 45.055,52.608 ; 44.895,52.768 45.055,52.608 ; v1(49.022,45.466) 43.624,45.466 ; C1.1@59.817,54.991 58.547,56.261 ; C3.1@63.627,68.326 62.357,69.596 U3.10@59.817,67.056 61.087,65.786 59.817,64.516 59.817,57.531 58.547,56.261 ; L3.1@64.897,36.576 66.167,35.306 ; U2.1@66.167,16.256 66.167,13.716 ; U2.28@66.167,31.496 67.12,32.448 67.12,34.353 66.167,35.306 ; BUS1.3@73.787,3.873 BUS1.3@73.787,6.096 ; 73.787,11.811 68.707,11.811 66.802,13.716 66.167,13.716 ; 14.097,39.116 21.399,39.116 ; 14.097,39.116 14.097,32.766 C8.1@11.557,30.226 L1.1@14.097,27.686 15.367,26.416 14.097,25.146 14.097,19.748 15.684,18.161 15.684,17.209 ; 15.684,12.446 15.684,17.209 ; 15.684,12.446 30.924,12.446 ; 21.399,39.116 29.337,39.116 33.782,43.561 ; 30.924,12.446 52.832,12.446 53.467,13.081 54.102,13.716 60.134,13.716 66.167,13.716 ; 31.877,67.056 33.782,65.151 v1(33.782,54.356) 33.782,43.561 ; 33.782,43.561 35.687,45.466 41.402,45.466 ; 41.402,45.466 41.402,48.323 41.402,48.959 45.052,52.608 45.055,52.608 ; 41.402,45.466 43.624,45.466 ; 43.624,45.466 47.117,41.974 48.704,41.974 56.642,34.036 C2.1@64.897,34.036 66.167,35.306 ; 45.055,52.608 48.704,56.258 48.704,56.261 49.34,56.261 57.912,56.261 58.547,56.261
  Back w0.505: 73.787,11.811 76.962,14.986 79.819,14.986 81.407,13.399 C14.1@81.407,11.811
  Back w1.016: U6.10@29.337,77.216 31.877,77.216 C6.1@33.147,78.486 34.417,79.756 57.277,79.756 U5.10@59.817,77.216
  Back w1.524: BUS1.29@7.747,3.873 C13.1@7.747,11.811 ; BUS1.3@73.787,6.096 73.787,11.811
VSYNC: FB5.2 U1.47 | length 30.5
  Front w0.368: U1.47@45.733,57.257 45.733,59.83 45.974,60.071
  Front w0.508: 45.974,60.071 47.561,61.658 47.625,61.658 60.77,61.658 61.087,61.976
  Front w0.762: 61.087,61.976 65.215,66.103 68.707,69.596 FB5.2@68.707,70.549
W\E\0\: U1.88 U3.3 U5.3 | length 46.4
  Front w0.368: U1.88@21.356,49.781 23.939,49.781 ; U5.3@42.037,76.581 U5.3@42.037,77.216
  Front w0.505: U3.3@42.037,67.056 42.037,70.231 43.307,71.501 43.307,75.311 U5.3@42.037,76.581
  Front w0.508: 23.939,49.781 v1(37.274,49.781)
  Back w0.508: v1(37.274,49.781) 37.274,62.293 U3.3@42.037,67.056
W\E\2\: U1.87 U4.3 U6.3 | length 36.8
  Front w0.368: 14.846,50.432 U1.87@21.356,50.432
  Front w0.505: 10.287,54.991 10.287,64.516 11.557,65.786 U4.3@11.557,67.056 11.557,70.231 12.827,71.501 12.827,75.311 11.557,76.581 U6.3@11.557,77.216
  Front w0.508: 10.287,54.991 14.846,50.432
copper on no net: | length 4.3
  Front w0.368: v1(63.627,58.166) v1(63.627,59.436) 64.897,58.166
  Back w0.368: v1(63.627,59.436) v1(64.897,59.436)

## Polygon pours and split planes (outlines as drawn)
GND on Front "Front-GND" (solid, remove dead copper, pour order 0): 104.267,7.366 104.267,87.376 0.127,87.376 0.127,8.954 81.407,8.954 81.407,7.366
GND on Back "Back-GND" (solid, remove dead copper, pour order 2): 104.267,7.366 104.267,87.376 0.127,87.376 0.127,8.954 5.842,8.954 5.842,12.763 12.827,19.748 12.827,25.463 12.509,25.781 10.604,25.781 9.652,26.733 9.652,41.021 16.637,48.006 16.637,70.549 17.907,71.819 64.897,71.819 66.167,70.549 66.167,66.421 62.039,62.293 62.039,55.308 59.182,52.768 46.482,52.768 43.942,50.228 43.942,48.006 44.895,47.053 66.802,47.053 68.072,45.783 68.072,15.938 82.042,15.938 82.995,14.986 82.995,10.541 82.677,10.223 78.549,10.223 78.232,9.906 78.232,8.954 81.407,8.954 81.407,7.366
VCC on Back "Back-VCC" (solid, remove dead copper, pour order 1): 77.597,8.954 77.597,10.223 78.232,10.858 82.359,10.858 82.359,14.668 81.724,15.303 67.437,15.303 67.437,45.466 66.484,46.419 44.577,46.419 43.307,47.688 43.307,50.546 46.164,53.404 59.182,53.404 61.404,55.626 61.404,62.611 65.532,66.739 65.532,70.231 64.579,71.183 18.224,71.183 17.272,70.231 17.272,47.688 10.287,40.703 10.287,27.051 10.922,26.416 12.827,26.416 13.462,25.781 13.462,19.431 6.477,12.446 6.477,8.954

## Keep-outs
Edge.Cuts:
  lines w0.381: 0.127,0.381 ccw(c0.762,0.381) 0.762,-0.254 ; 0.127,0.381 ccw(c0.762,0.381) 0.762,-0.254 ; 0.127,0.381 0.127,84.836 ; 0.127,0.381 0.127,84.836 ; 0.127,84.836 cw(c2.667,84.836) 2.667,87.376 ; 0.127,84.836 cw(c2.667,84.836) 2.667,87.376 ; 0.762,-0.254 80.772,-0.254 ; 0.762,-0.254 80.772,-0.254 ; 2.667,87.376 101.727,87.376 ; 2.667,87.376 101.727,87.376 ; 80.772,-0.254 ccw(c80.772,0.381) 81.407,0.381 ; 80.772,-0.254 ccw(c80.772,0.381) 81.407,0.381 ; 81.407,0.381 81.407,7.366 ; 81.407,0.381 81.407,7.366 ; 81.407,7.366 101.727,7.366 ; 81.407,7.366 101.727,7.366 ; 101.727,7.366 ccw(c101.727,9.906) 104.267,9.906 ; 101.727,7.366 ccw(c101.727,9.906) 104.267,9.906 ; 101.727,87.376 cw(c101.727,84.836) 104.267,84.836 ; 101.727,87.376 cw(c101.727,84.836) 104.267,84.836 ; 104.267,9.906 104.267,84.836 ; 104.267,9.906 104.267,84.836

## Silkscreen, mask and mechanical layers (free items; w line width, h text height)
F.SilkS:
  lines w0.254: 37.274,14.986 38.544,13.716 ; 39.179,14.351 40.45,13.081 ; 37.274,14.351 38.544,13.081 ; 37.274,14.351 36.005,13.081 34.734,13.081 37.274,15.621 ; 37.274,14.351 37.274,15.621 ; 37.274,15.621 38.544,14.351 ; 38.544,13.081 39.179,13.716 ; 38.544,13.081 38.544,14.351 ; 38.544,14.351 39.179,14.986 ; 39.179,13.716 39.814,13.081 41.084,13.081 39.179,14.986 ; 39.179,13.716 39.179,14.986
  text "ISA Super VGA / Version 1.1 / Copyright (C) 2017 / Sergey Kiselev" at 81.177,75.14 h1.52
  text "JP1: Select monitor's / horizontal frequency: / Open: >= 48.7 kHz / Closed: < 48.7 kHz" at 2.349,44.582 h1.02
  text "www.malinov.com" at 30.457,10.943 h1.27

## Text inside footprints (layer, text, board x,y; h text height)
C13: F.SilkS "+" at 7.108,8.632 h1.02
C14: F.SilkS "+" at 80.768,13.712 h1.02
C15: F.SilkS "+" at 10.918,32.127 h1.02
C16: F.SilkS "+" at 73.148,43.557 h1.02
U1: F.SilkS "1" at 53.269,27.682 h1.02 r90; F.SilkS "160" at 48.317,21.26 h1.02; F.SilkS "40" at 57.493,53.337 h1.02 r90; F.SilkS "10" at 57.493,33.917 h1.02 r90; F.SilkS "20" at 57.493,40.337 h1.02 r90; F.SilkS "30" at 57.493,46.837 h1.02 r90; F.SilkS "41" at 51.643,56.48 h1.02 r90; F.SilkS "81" at 22.067,55.18 h1.02 r90; F.SilkS "121" at 24.018,24.906 h1.02 r90; F.SilkS "50" at 44.493,60.812 h1.02 r90; F.SilkS "60" at 37.993,60.838 h1.02 r90; F.SilkS "70" at 31.493,60.812 h1.02 r90; F.SilkS "80" at 24.993,60.812 h1.02 r90; F.SilkS "90" at 18.169,47.487 h1.02 r90; F.SilkS "100" at 18.169,40.615 h1.02 r90; F.SilkS "110" at 18.169,34.195 h1.02 r90; F.SilkS "120" at 18.169,27.615 h1.02 r90; F.SilkS "130" at 28.923,21.26 h1.02; F.SilkS "140" at 37.343,19.815 h1.02 r90; F.SilkS "150" at 43.843,19.815 h1.02 r90